# Altium PCB PCB2.PcbDoc
Units mm, origin at the board's own origin, x right, y up, seen from the top; angles counter-clockwise.
Board outline 49.4 x 66.43 mm, 2 copper layers (Top Layer, Bottom Layer); 50 components, 43 nets, 184 pads, 10 vias.
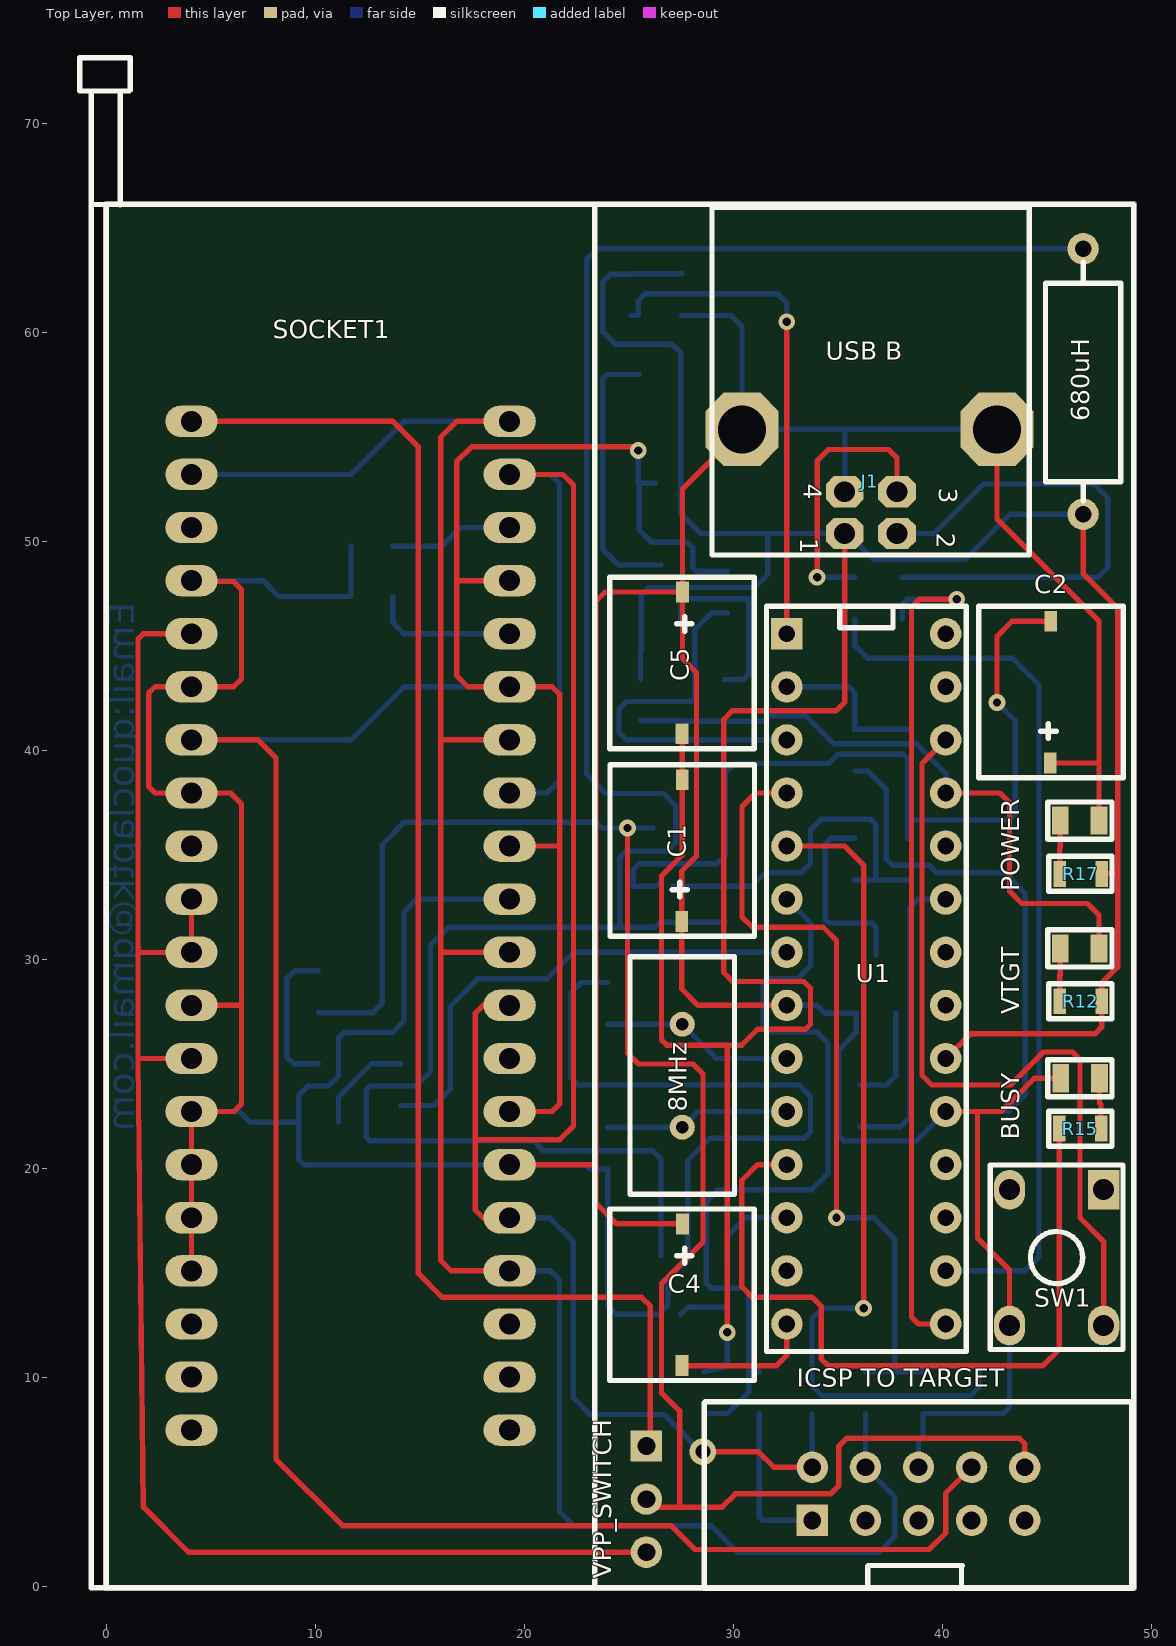
[diagram p0: Top Layer view]
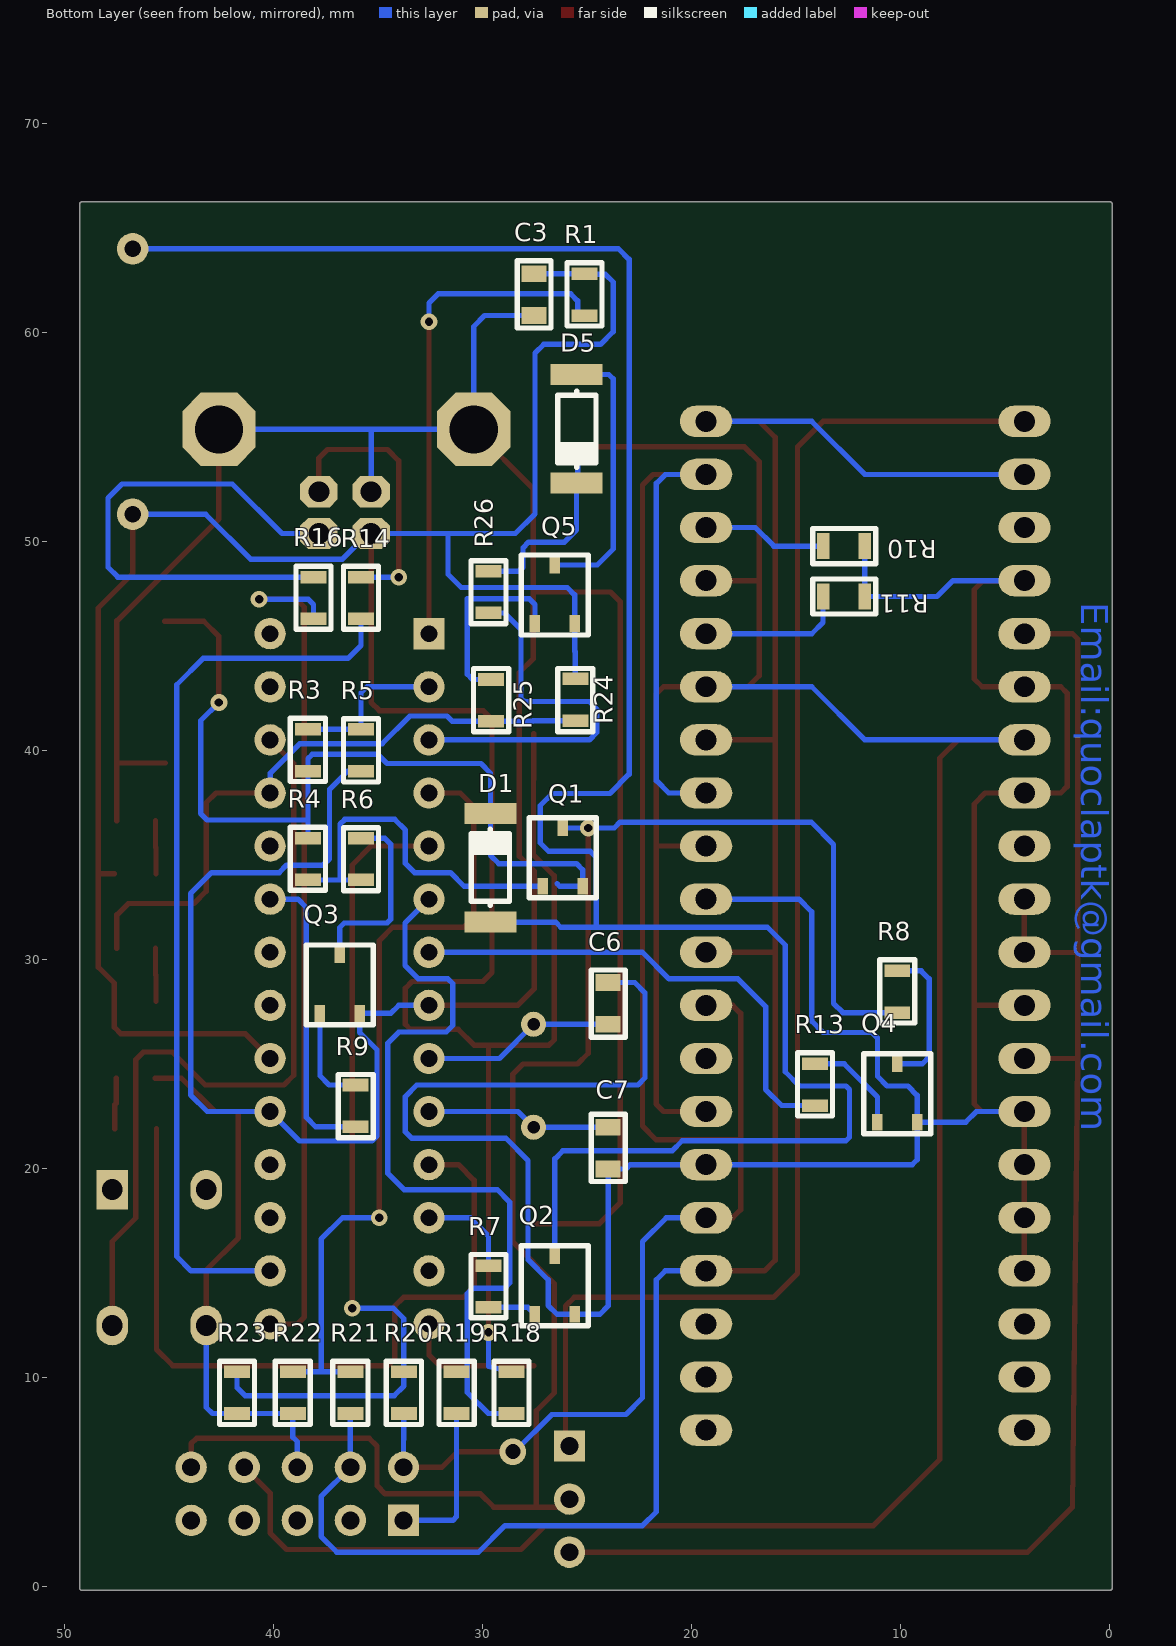
[diagram p1: Bottom Layer view, seen from below]

## Layer stack, top to bottom
Top Solder: solder mask 0.0102, Solder Resist, Dk 3.5
Top Layer: signal copper 0.0356
Dielectric 1: dielectric 0.32, FR-4, Dk 4.8
Bottom Layer: signal copper 0.0356
Bottom Solder: solder mask 0.0102, Solder Resist, Dk 3.5

## Board outline
-0.127,-0.047 -0.127,66.128 cw(c0,66.128) 0,66.255 49.149,66.255 cw(c49.149,66.128) 49.276,66.128 49.276,-0.047 cw(c49.149,-0.047) 49.149,-0.174 0,-0.174 cw(c0,-0.047)

## Design rules (kind name [scope] priority, off if disabled: settings)
Clearance [All] p1: gap=0.254 ignorepadtopadclearanceinfootprint=FALSE except(0: Arc-Hole Track-Hole SMDPad-Hole THPad-Hole Via-Hole Fill-Hole Poly-Hole Region-Hole Text-Hole)
PolygonConnect [All] p1: connectstyle=Relief reliefconductorwidth=0.254 reliefentries=4 polygonreliefangle="90 Angle" airgapwidth=0.254
RoutingVias [All] p1: holewidth=0.711 width=1.27 viastyle="Through Hole" minholewidth=0.711 minwidth=1.27 maxholewidth=0.711 maxwidth=1.27
SolderMaskExpansion [All] p1: expansion=0.102 istentingtop=FALSE
Width [All] p1: maxlimit=0.254 minlimit=0.254 preferedwidth=0.254
30 further rules are at their usual default settings.

## Components (designator, comment, footprint, x,y, rotation, side; value= is the part's Value field where it differs from the comment)
8MHz "8MHz" HC-49_THROUGH 27.559,24.458 r90 top (schematic designator Y1)
680uH "680uH" RES-0.5W-HH-MO 46.736,57.658 r90 top (schematic designator R2)
BUSY "LED0805" L0805RED 46.597,24.328 r270 top (schematic designator D3)
C1 "100uF" CAP_6.3_100uF 27.546,35.217 r90 top
C2 "10uF" CAP_6.3_100uF 45.185,42.799 r90 top
C3 "100nF" C0805 27.535,61.814 r90 bottom
C4 "22uF" CAP_6.3_100uF 27.559,13.97 r270 top
C5 "100uF" CAP_6.3_100uF 27.559,44.196 r270 top
C6 "22pF" C0805 23.99,27.908 r270 bottom
C7 "22pF" C0805 23.99,20.983 r90 bottom
D1 "1N4148" DO-213AB 29.591,34.417 r270 bottom
D5 "1N4148" DO-213AB 25.527,55.372 r90 bottom
"ICSP TO TARGET" "ICSP" IDC_CONNECTOR_10x2.54 38.862,4.445 r90 top (schematic designator J2)
J1 "USB B" USB-B-TYPE 35.33,50.384 r270 top
POWER "LED0805" L0805RED 46.569,36.652 r90 top (schematic designator D4)
Q1 "2N3906" SOT23-3 26.162,34.913 r180 bottom
Q2 "2N3904" SOT23-3 26.543,14.437 r180 bottom
Q3 "2N3904" SOT23-3 36.83,28.829 r180 bottom
Q4 "2N3904" SOT23-3 10.16,23.619 r180 bottom
Q5 "2N3906" SOT23-3 26.543,47.483 r180 bottom
R1 "2K2" R0805 23.597,61.763 r270 bottom
R3 "4K7" R0805 36.83,39.971 r270 bottom
R4 "100k" R0805 36.83,34.764 r270 bottom
R5 "2K7" R0805 37.338,40.071 r90 bottom
R6 "10k" R0805 37.338,34.864 r90 bottom
R7 "10k" R0805 28.194,14.317 r270 bottom
R8 "10k" R0805 8.636,28.414 r270 bottom
R9 "10k" R0805 37.592,23.053 r90 bottom
R10 "1K" R0805 12.761,48.26 r0 bottom
R11 "1K" R0805 12.761,45.847 r0 bottom
R12 "470" R0805 46.672,29.535 r0 top
R13 "10k" R0805 12.573,23.969 r270 bottom
R14 "10k" R0805 34.29,47.248 r270 bottom
R15 "470" R0805 46.545,20.391 r180 top
R16 "10k" R0805 36.566,47.248 r270 bottom
R17 "470" R0805 46.672,35.631 r0 top
R18 "4K7" R0805 30.136,9.337 r90 bottom
R19 "33" R0805 32.766,9.337 r90 bottom
R20 "33" R0805 35.287,9.337 r90 bottom
R21 "33" R0805 37.846,9.337 r90 bottom
R22 "4K7" R0805 40.601,9.337 r90 bottom
R23 "4K7" R0805 43.268,9.337 r90 bottom
R24 "10k" R0805 27.086,42.482 r90 bottom
R25 "10k" R0805 28.067,42.352 r270 bottom
R26 "10k" R0805 31.242,47.638 r90 bottom
SOCKET1 "ZIP-40" ZIP-40 11.742,32.791 r0 top
SW1 "Button1" BUTTON_HOLE_4.3mm 45.466,15.748 r0 top
U1 "PIC18F2550" DIP28_M04 36.364,29.083 r0 top
VPP_SWITCH "Header 3x1 TH Pitch 2.54mm" "Header 3x1 TH Pitch 2.54mm" 25.843,4.191 r270 top (schematic designator J3)
VTGT "LED0805" L0805RED 46.569,30.539 r90 top (schematic designator D2)

## Footprints (in the part's own frame and the unit in brackets; to place one, negate y for a bottom-side part, rotate by r counter-clockwise, add the part's x,y. Pads: shape width x height; smd on the part's side, far side on the other; paste and mask are expansions set on the pad)
BUTTON_HOLE_4.3mm [mm]
  rect 1.5x1.9 hole 1: 1(2.25,3.25)
  oval 1.5x1.9 hole 1: 2(2.25,-3.25) 3(-2.25,3.25) 4(-2.25,-3.25)
  silkscreen extent -3.17,-4.4 3.17,4.42, body extent -3,-3.86 3,3.86, height 4.3
C0805 [mm]
  rect 0.8x1.2 smd: 1(-1,0) 2(1,0)
  silkscreen extent -1.6,-0.81 1.63,0.81, body extent -1,-0.63 1,0.63, height 0.58
CAP_6.3_100uF [mm]
  rect 1x0.6 smd: 1(3.391,-0.013) 2(-3.391,0.013)
  silkscreen extent -4.1,-3.47 4.1,3.44, body extent -3.64,-3.31 3.66,3.29, height 5.9
DIP28_M04 [mm]
  rect 1.5x1.5 hole 0.8: 1(-3.8,16.51)
  round 1.5 hole 0.8: 2(-3.8,13.97) 3(-3.8,11.43) 4(-3.8,8.89) 5(-3.8,6.35) 6(-3.8,3.81) 7(-3.8,1.27) 8(-3.8,-1.27) 9(-3.8,-3.81) 10(-3.8,-6.35) 11(-3.8,-8.89) 12(-3.8,-11.43) 13(-3.8,-13.97) 14(-3.8,-16.51) 15(3.8,-16.51) 16(3.8,-13.97) 17(3.8,-11.43) 18(3.8,-8.89) 19(3.8,-6.35) 20(3.8,-3.81) 21(3.8,-1.27) 22(3.8,1.27) 23(3.8,3.81) 24(3.8,6.35) 25(3.8,8.89) 26(3.8,11.43) 27(3.8,13.97) 28(3.8,16.51)
  silkscreen extent -4.78,-17.83 4.78,17.83, body extent -3.9,-17.7 3.98,17.7, height 5.2
DO-213AB [mm]
  rect 1x2.5 smd: 1(2.625,-0.025) 2(-2.575,-0.025)
  silkscreen extent -1.82,-0.95 1.82,0.88, body extent -2.6,-1.3 2.6,1.3, height 2.64
HC-49_THROUGH [mm]
  round 1.2 hole 0.6: 1(-2.475,0) 2(2.45,0)
  silkscreen extent -5.68,-2.5 5.67,2.5, body extent -5.67,-2.5 5.68,2.5, height 3.68
"Header 3x1 TH Pitch 2.54mm" [mm]
  rect 1.5x1.5 hole 0.85: 1(-2.54,0)
  round 1.5 hole 0.85: 2(0,0) 3(2.54,0)
  body extent -3.81,-1.27 3.81,1.27, height 8.89
IDC_CONNECTOR_10x2.54 [mm]
  rect 1.5x1.5 hole 0.85: 1(-1.27,5.08)
  round 1.5 hole 0.85: 2(1.27,5.08) 3(-1.27,2.54) 4(1.27,2.54) 5(-1.27,0) 6(1.27,0) 7(-1.27,-2.54) 8(1.27,-2.54) 9(-1.27,-5.08) 10(1.27,-5.08)
  silkscreen extent -4.52,-10.2 4.4,10.25, body extent -4.5,-10.25 4.4,10.25, height 3.1
L0805RED [mm]
  rect 1.35x0.8 smd: 1(0,0.925) 2(0,-0.925)
  silkscreen extent -0.89,-1.55 0.89,1.52, body extent -0.67,-1.05 0.68,1.05, height 0.9
R0805 [mm]
  rect 0.6x1.24 smd: 1(-1.05,-1.524) 2(0.95,-1.524)
  silkscreen extent -1.57,-2.36 1.45,-0.69, body extent -1.05,-2.15 0.95,-0.9, height 0.45
RES-0.5W-HH-MO [mm]
  round 1.5 hole 0.8: 1(-6.35,0) 2(6.35,0)
  silkscreen extent -5.7,-1.8 5.7,1.8, body extent -6.62,-1.8 6.63,1.8, height 3.9
SOT23-3 [mm]
  rect 0.5x0.8 smd: 1(-0.95,-1.4) 2(0.95,-1.4) 3(0,1.4)
  silkscreen extent -1.6,-1.95 1.6,1.88, body extent -1.45,-1.4 1.45,1.4, height 1.3
USB-B-TYPE [mm]
  oct 1.5x1.8 hole 1: 1(0,0) 2(0,2.5) 3(-2,2.5) 4(-2,0)
  oct 3.5x3.5 hole 2.3: S1(-4.988,7.283) S2(-4.988,-4.909)
  silkscreen extent -15.6,-6.35 1.03,8.82, body extent -15.45,-6.18 0.85,8.68, height 10.98
ZIP-40 [mm]
  oval 2.5x1.5 hole 1: 1(-7.663,22.962) 2(-7.663,20.422) 3(-7.663,17.882) 4(-7.663,15.342) 5(-7.663,12.802) 6(-7.663,10.262) 7(-7.663,7.722) 8(-7.663,5.182) 9(-7.663,2.642) 10(-7.663,0.102) 11(-7.663,-2.438) 12(-7.663,-4.978) 13(-7.663,-7.518) 14(-7.663,-10.058) 15(-7.663,-12.598) 16(-7.663,-15.138) 17(-7.663,-17.678) 18(-7.663,-20.218) 19(-7.663,-22.758) 20(-7.663,-25.298) 21(7.562,-25.298) 22(7.562,-22.758) 23(7.562,-20.218) 24(7.562,-17.678) 25(7.562,-15.138) 26(7.562,-12.598) 27(7.562,-10.058) 28(7.562,-7.518) 29(7.562,-4.978) 30(7.562,-2.438) 31(7.562,0.102) 32(7.562,2.642) 33(7.562,5.182) 34(7.562,7.722) 35(7.562,10.262) 36(7.562,12.802) 37(7.562,15.342) 38(7.562,17.882) 39(7.562,20.422) 40(7.562,22.962)
  silkscreen extent -13.01,-32.84 11.64,40.36, body extent -13.03,-32.64 11.45,40.42, height 21.35

## Part data
8MHz: library part Crystal
680uH: library part "Resistors THD"
C1 C2 C4 C5: library part Capacitor(Radian)
C3 C6 C7: library part Capacitors(SMD)
D1 D5: library part "Diode 1N4148 SMD"
"ICSP TO TARGET": library part IDC_CONNECTOR_5x2
J1: library part "USB B Type"
R1 R3 R4 R5 R6 R7 R8 R9 R10 R11 R12 R13 R14 R15 R16 R17 R18 R19 R20 R21 R22 R23 R24 R25 R26: library part "Resistor SMD"

## Via types
v1: diameter 0.8, hole 0.4, Top Layer to Bottom Layer, 9 vias
v2: diameter 1.27, hole 0.711, Top Layer to Bottom Layer, 1 vias

## Nets (pads, with @x,y where several pads share a name; then routed paths per layer and width w, separated by ;. In a path a pad name is that pad's centre, name@x,y a point inside that pad or via, vN(x,y) a via of type N, cw(c..) or ccw(c..) an arc to the next point about the centre after c; other vN are vias at no path point)
AUX: R18.1 R19.2 U1.6 | length 38.3
  Bottom Layer w0.254: R18.1 29.725,8.287 30.734,9.296 R19.2@30.734,10.287 ; R19.2 R19.2@30.734,10.287 ; U1.6 33.706,31.751 33.706,29.718 33.071,29.083 31.656,29.083 31.42,28.847 31.42,26.861 31.738,26.543 34.002,26.543 34.532,26.013 34.532,19.775 33.755,18.998 29.298,18.998 28.702,18.402 28.702,14.529 28.956,14.275 30.48,14.275 30.734,14.021 R19.2@30.734,10.287
BT: SW1.2 U1.26 | length 38.3
  Top Layer w0.254: U1.26 39.033,39.382 39.033,24.467 39.497,24.003 43.268,24.003 44.843,25.578 46.228,25.578 46.584,25.222 46.584,17.653 47.716,16.521 SW1.2
BUSY: R15.2 U1.11 | length 36.7
  Top Layer w0.254: U1.11 31.157,20.193 30.404,19.44 30.404,14.357 30.918,13.843 33.782,13.843 34.203,13.423 34.203,10.909 34.532,10.579 44.822,10.579 45.595,11.353 R15.2
CLK: "ICSP TO TARGET.2" R20.1 SOCKET1.25 SOCKET1.29 SOCKET1.33 SOCKET1.39 | length 97.6
  Top Layer w0.254: SOCKET1.25 18.034,17.653 17.653,18.034 17.653,21.383 ; SOCKET1.29 18.034,27.813 17.653,27.432 17.653,21.383 ; SOCKET1.39 21.844,53.213 22.352,52.705 22.352,22.042 21.693,21.383 17.653,21.383 ; v2(28.55,6.465) 31.189,6.465 31.939,5.715 33.782,5.715
  Bottom Layer w0.254: SOCKET1.25 21.209,17.653 22.349,16.513 22.349,9.04 23.146,8.243 26.683,8.243 28.461,6.465 v2(28.55,6.465) ; SOCKET1.33 21.093,37.973 21.685,38.565 21.685,52.785 21.257,53.213 SOCKET1.39 ; R20.1 33.763,7.055 33.782,7.036 33.782,5.842
DAT: "ICSP TO TARGET.4" R21.1 SOCKET1.2 SOCKET1.24 SOCKET1.30 SOCKET1.34 SOCKET1.40 | length 106.5
  Top Layer w0.254: SOCKET1.24 16.51,15.113 16.002,15.621 16.002,30.339 ; SOCKET1.30 16.016,30.353 16.002,30.339 ; SOCKET1.34 16.012,40.513 16.002,40.503 ; SOCKET1.40 16.764,55.753 16.002,54.991 16.002,40.503 ; 16.002,30.339 16.002,40.503
  Bottom Layer w0.254: SOCKET1.2 11.709,53.213 14.249,55.753 SOCKET1.40 ; SOCKET1.24 21.258,15.113 21.685,14.686 21.685,3.588 22.352,2.921 28.929,2.921 30.199,1.651 36.969,1.651 37.72,2.402 37.72,4.317 36.322,5.715 ; 36.322,5.842 R21.1
DATA+: R14.2 U1.16 | length 43
  Bottom Layer w0.254: R14.2 35.814,45.033 36.434,44.413 43.364,44.413 44.628,43.15 44.628,15.799 43.942,15.113 U1.16
DATA-: R16.2 U1.15 | length 41.5
  Top Layer w0.254: U1.15 38.862,12.573 38.525,12.91 38.525,46.859 38.909,47.244 v1(40.691,47.244)
  Bottom Layer w0.254: R16.2 38.09,46.99 38.344,47.244 v1(40.691,47.244)
GND: "ICSP TO TARGET.6" BUSY.2 C1.2 C2.2 C3.1 C4.2 C5.2 C6.1 C7.1 J1.4 J1.S1 J1.S2 POWER.2 Q2.2 Q3.2 Q4.2 R5.1 R10.1 R11.1 R22.1 R23.1 SOCKET1.4 SOCKET1.6 SOCKET1.8 SOCKET1.12 SOCKET1.14 SOCKET1.15 SOCKET1.16 SOCKET1.17 SOCKET1.26 SOCKET1.31 SW1.4 U1.8 U1.19 | length 334.2
  Top Layer w0.254: SOCKET1.17 SOCKET1.16 SOCKET1.15 SOCKET1.14 6.12,22.733 6.477,23.09 6.477,27.787 ; SOCKET1.12 6.451,27.813 6.477,27.787 ; SOCKET1.4 4.125,48.087 6.096,48.087 6.477,47.706 6.477,43.434 6.096,43.053 SOCKET1.6 2.337,43.053 2.032,42.748 2.032,38.278 2.337,37.973 SOCKET1.8 5.954,37.973 6.477,37.45 6.477,27.787 ; SOCKET1.26 23.321,20.193 23.419,20.095 ; C4.2 24.422,17.361 23.419,18.364 23.419,20.095 ; J1.S2 27.572,52.522 C5.2 ; U1.8 28.321,27.813 27.534,28.6 27.534,31.55 27.534,34.239 28.245,34.95 28.245,43.726 27.572,44.399 C5.2 ; U1.19 41.681,22.733 ; J1.S1 42.613,51.087 47.494,46.207 47.494,39.4 ; SW1.4 43.216,15.154 41.681,16.689 41.681,22.733 ; C2.2 47.486,39.408 47.494,39.4 ; BUSY.2 44.403,24.328 42.808,22.733 41.681,22.733 ; POWER.2 47.494,39.4 ; 23.419,20.095 23.419,20.193 23.419,47.13 23.876,47.587 C5.2
  Bottom Layer w0.254: SOCKET1.14 6.375,22.733 6.889,22.219 Q4.2 ; SOCKET1.4 7.493,48.133 8.255,47.371 R11.1 R10.1 ; SOCKET1.31 14.858,32.893 14.249,32.284 14.249,27.056 13.711,26.518 11.37,26.518 11.11,26.258 11.11,24.42 10.643,23.952 9.652,23.952 9.21,23.51 Q4.2 ; C6.1 22.719,28.908 22.225,28.414 22.225,24.35 22.572,24.003 33.147,24.003 33.695,23.455 33.695,21.757 33.401,21.463 28.891,21.463 27.823,20.395 27.823,15.647 26.862,14.686 26.862,13.462 26.437,13.037 Q2.2 24.39,13.037 23.99,13.437 C7.1 23.146,19.983 22.936,20.193 SOCKET1.26 9.442,20.193 9.21,20.425 Q4.2 ; C3.1 29.899,60.814 30.421,60.292 J1.S2 35.33,55.372 ; U1.8 34.011,27.813 34.395,27.429 Q3.2 35.88,26.518 35.052,25.69 35.052,21.56 35.29,21.322 38.753,21.322 U1.19 43.168,22.733 43.966,23.531 43.966,33.165 42.968,34.163 39.726,34.163 39.37,34.519 37.628,34.519 37.323,34.823 37.323,38.147 36.449,39.021 R5.1 ; J1.4 35.33,55.372 ; 38.862,5.842 38.862,6.934 39.077,7.149 R22.1 R23.1 42.919,8.287 43.216,8.584 SW1.4 ; J1.S1 35.33,55.372
ICSP_CLK: R20.2 R23.2 U1.5 | length 40.2
  Top Layer w0.254: U1.5 35.33,35.433 36.235,34.528 v1(36.235,13.324)
  Bottom Layer w0.254: v1(36.235,13.324) 34.267,13.324 33.763,12.819 R20.2 33.763,9.606 34.225,9.144 41.363,9.144 41.744,9.525 R23.2
ICSP_DAT: R21.2 R22.2 U1.4 | length 38.2
  Top Layer w0.254: U1.4 31.067,37.973 30.421,37.327 30.421,32.046 30.918,31.55 34.305,31.55 34.937,30.918 v1(34.937,17.653)
  Bottom Layer w0.254: v1(34.937,17.653) 36.703,17.653 37.72,16.636 37.72,10.287 ; R21.2 37.72,10.287 ; R22.2 37.72,10.287
MCRL: R13.2 U1.7 | length 23.8
  Bottom Layer w0.254: R13.2 15.686,23.019 16.459,23.792 16.459,27.762 17.78,29.083 21.079,29.083 22.349,30.353 U1.7
NetC2_1: C2.1 D1.2 Q1.2 R3.2 R4.1 | length 40.7
  Top Layer w0.254: v1(42.613,42.303) 42.613,45.465 43.338,46.19 C2.1
  Bottom Layer w0.254: 26.437,33.643 26.307,33.513 Q1.2 25.212,34.301 25.502,34.591 29.224,34.591 29.616,34.983 D1.2 29.616,38.919 30.079,39.382 34.564,39.382 35.009,39.827 38.141,39.827 38.354,39.614 R3.2 38.354,36.685 ; R4.1 38.354,36.685 ; v1(42.613,42.303) 43.488,41.428 43.488,36.992 43.181,36.685 38.354,36.685
NetC4_1: C4.1 U1.14 | length 6.7
  Top Layer w0.254: C4.1 32.064,10.579 32.564,11.079 U1.14
NetD1_1: 680uH.2 D1.1 Q2.3 | length 107
  Bottom Layer w0.254: Q2.3 26.543,20.472 26.162,20.853 20.93,20.853 20.447,21.336 12.612,21.336 12.446,21.502 12.446,23.787 12.612,23.952 14.834,23.952 15.519,24.638 15.519,30.699 16.37,31.55 24.562,31.55 ; D1.1 26.5,31.792 26.257,31.55 24.562,31.55 ; 680uH.2 23.495,64.008 22.987,63.5 22.987,38.872 23.91,37.95 26.654,37.95 27.243,37.361 27.243,35.59 26.832,35.179 24.846,35.179 24.562,34.894 24.562,31.55
NetD2_1: R12.1 VTGT.1 | length 2.5
  Top Layer w0.254: R12.1 45.622,29.261 45.644,29.283 VTGT.1
NetD3_1: BUSY.1 R15.1 | length 2.4
  Top Layer w0.254: BUSY.1 47.522,23.136 47.595,23.063 R15.1
NetD4_1: POWER.1 R17.1 | length 2.6
  Top Layer w0.254: R17.1 45.622,35.357 45.644,35.379 POWER.1
NetJ1_2: J1.2 R16.1 | length 24.7
  Bottom Layer w0.254: J1.2 39.599,50.384 41.974,52.759 47.247,52.759 47.922,52.083 47.922,48.773 47.447,48.298 R16.1
NetJ1_3: J1.3 R14.1 | length 13.2
  Top Layer w0.254: v1(34.011,48.298) 34.011,53.861 34.556,54.407 37.417,54.407 37.83,53.994 J1.3
  Bottom Layer w0.254: v1(34.011,48.298) R14.1
NetJ2_1: "ICSP TO TARGET.1" R19.1 | length 7.5
  Bottom Layer w0.254: R19.1 31.242,3.353 31.42,3.175 33.782,3.175
NetQ1_1: Q1.1 R4.2 R6.1 | length 17.3
  Bottom Layer w0.254: Q1.1 30.885,33.513 31.535,34.163 33.253,34.163 33.695,34.605 33.695,36.205 34.203,36.713 36.587,36.713 36.815,36.485 36.815,33.814 ; R6.1 36.815,33.814 ; R4.2 36.815,33.814
NetQ2_1: Q2.1 R7.2 | length 2.4
  Bottom Layer w0.254: Q2.1 27.823,13.367 R7.2
NetQ3_1: Q3.1 R9.2 | length 4.9
  Bottom Layer w0.254: R9.2 37.338,24.003 37.78,24.445 Q3.1
NetQ3_3: Q3.3 R6.2 | length 9
  Bottom Layer w0.254: R6.2 34.683,35.814 34.395,35.526 34.395,31.92 34.565,31.749 36.615,31.749 36.83,31.535 Q3.3
NetQ4_1: Q4.1 R13.1 | length 4.9
  Bottom Layer w0.254: Q4.1 11.11,23.429 12.7,25.019 R13.1
NetQ4_3: Q4.3 R8.1 | length 7.1
  Bottom Layer w0.254: Q4.3 8.96,25.019 8.636,25.343 8.636,29.083 9.017,29.464 R8.1
NetQ5_1: Q5.1 R25.1 | length 9.1
  Bottom Layer w0.254: Q5.1 27.493,46.99 27.772,47.269 30.734,47.269 30.734,43.656 30.48,43.402 R25.1
NetR1_2: R1.2 U1.1 | length 24.6
  Top Layer w0.254: v1(32.564,60.514) U1.1 U1.1@32.766,45.795
  Bottom Layer w0.254: R1.2 25.451,60.814 25.451,61.519 25.781,61.849 32.131,61.849 32.564,61.416 v1(32.564,60.514)
NetR10_2: R10.2 SOCKET1.38 | length 6
  Bottom Layer w0.254: R10.2 16.063,49.784 16.952,50.673 SOCKET1.38
NetR11_2: R11.2 SOCKET1.36 | length 7.1
  Bottom Layer w0.254: R11.2 13.711,46.132 14.249,45.593 SOCKET1.36
OSC1: 8MHz.2 C6.2 U1.9 | length 9.3
  Bottom Layer w0.254: C6.2 8MHz.2 29.194,25.273 U1.9
OSC2: 8MHz.1 C7.2 U1.10 | length 8.9
  Bottom Layer w0.254: C7.2 8MHz.1 28.309,22.733 U1.10
PWR_TGT: D5.1 Q5.3 | length 13.1
  Bottom Layer w0.254: D5.1 23.961,57.997 23.749,57.785 23.749,49.645 24.511,48.883 Q5.3
VCC: 680uH.1 C1.1 C3.2 C5.1 J1.1 Q5.2 R1.1 R12.2 R17.2 R18.2 R24.2 U1.20 | length 157.8
  Top Layer w0.254: C5.1 27.553,40.799 27.553,38.614 C1.1 27.559,35.001 26.568,34.011 26.568,26.162 26.822,25.908 29.718,25.908 ; v1(29.718,12.167) 29.718,25.908 ; J1.1 35.33,42.303 34.937,41.91 29.972,41.91 29.546,41.484 29.546,29.382 29.972,28.956 33.37,28.956 33.695,28.631 33.695,26.908 33.457,26.67 31.166,26.67 30.404,25.908 29.718,25.908 ; U1.20 41.341,26.45 47.302,26.45 47.622,26.77 R12.2 47.622,28.876 48.387,29.642 48.387,34.164 ; 680uH.1 46.736,48.472 48.387,46.821 48.387,34.164 ; R17.2 48.33,34.107 48.387,34.164
  Bottom Layer w0.254: R24.2 25.562,44.729 25.593,44.76 Q5.2 25.593,47.45 25.946,47.803 31.019,47.803 31.656,48.439 31.656,50.384 ; C3.2 R1.1 25.091,62.784 24.12,62.784 23.749,62.414 23.749,60.046 24.359,59.436 27.071,59.436 27.493,59.014 27.493,51.326 28.435,50.384 31.656,50.384 ; R18.2 29.718,10.541 v1(29.718,12.167) ; 680uH.1 43.245,51.308 41.086,49.149 36.715,49.149 35.48,50.384 J1.1 31.656,50.384
VDD_FD: R26.1 U1.3 | length 18.3
  Bottom Layer w0.254: R26.1 28.956,46.587 28.159,45.79 28.159,42.507 27.998,42.346 24.892,42.346 24.536,41.99 24.536,40.869 24.892,40.513 U1.3
VDD_TGT_P: R24.1 R25.2 U1.25 VTGT.2 | length 30.6
  Top Layer w0.254: U1.25 42.753,37.973 43.216,37.51 43.216,33.276 43.802,32.69 46.945,32.69 47.494,32.141 VTGT.2
  Bottom Layer w0.254: R24.1 27.584,41.432 27.615,41.402 R25.2 31.445,41.402 31.699,41.656 33.477,41.656 34.798,40.335 38.742,40.335 40.164,38.914 U1.25
Vddp: "ICSP TO TARGET.8" D5.2 R26.2 SOCKET1.7 SOCKET1.27 SOCKET1.32 SOCKET1.35 SOCKET1.37 | length 154
  Top Layer w0.254: SOCKET1.7 7.264,40.513 8.128,39.649 8.128,6.096 11.303,2.921 27.017,2.921 28.16,1.778 39.37,1.778 40.164,2.572 40.164,4.477 41.402,5.715 ; SOCKET1.27 21.336,22.733 21.693,23.09 21.693,35.425 ; SOCKET1.32 21.685,35.433 21.693,35.425 ; SOCKET1.37 16.792,48.133 16.764,48.161 ; v1(25.451,54.356) 25.273,54.534 17.476,54.534 16.764,53.822 16.764,48.161 ; 41.338,5.779 41.402,5.842 ; 16.764,48.161 16.764,43.585 17.296,43.053 SOCKET1.35 21.336,43.053 21.693,42.696 21.693,35.425
  Bottom Layer w0.254: SOCKET1.7 11.709,40.513 14.249,43.053 SOCKET1.35 ; v1(25.451,54.356) 25.451,52.797 D5.2 ; D5.2@26.264,52.797 D5.2 ; R26.2 28.248,48.587 28.067,48.768 28.067,49.701 27.793,49.975 26.083,49.975 25.502,50.556 D5.2
VPP: "ICSP TO TARGET.10" Q1.3 R8.2 VPP_SWITCH.2 | length 82.7
  Top Layer w0.254: v1(24.943,36.297) 24.943,25.521 25.46,25.003 28.069,25.003 28.55,24.523 28.55,16.485 26.568,14.503 26.568,9.276 27.432,8.413 27.432,3.81 ; VPP_SWITCH.2@26.035,3.81 27.432,3.81 ; 43.942,5.715 43.942,6.846 43.688,7.1 35.421,7.1 35.052,6.731 35.052,4.838 34.659,4.445 30.099,4.445 29.464,3.81 27.432,3.81
  Bottom Layer w0.254: R8.2 12.764,27.464 13.208,27.908 13.208,35.51 14.274,36.576 23.419,36.576 23.698,36.297 v1(24.943,36.297) 26.162,36.297 Q1.3
VPP1: SOCKET1.5 SOCKET1.10 SOCKET1.11 SOCKET1.13 VPP_SWITCH.3 | length 76.8
  Top Layer w0.254: SOCKET1.13 1.524,25.261 ; SOCKET1.10 SOCKET1.11 1.524,30.341 ; SOCKET1.5 1.778,45.593 1.524,45.339 1.524,30.341 ; VPP_SWITCH.3 3.937,1.651 1.778,3.81 1.524,25.261 ; 1.524,25.261 1.524,30.341
VPP2: SOCKET1.1 VPP_SWITCH.1 | length 69.7
  Top Layer w0.254: SOCKET1.1 13.716,55.753 14.935,54.534 14.935,14.986 16.078,13.843 25.615,13.843 26.035,13.423 VPP_SWITCH.1@26.035,6.35
VPP_FD: R3.1 R5.2 U1.2 | length 7.7
  Bottom Layer w0.254: U1.2 35.527,43.053 35.814,42.766 R5.2 R3.1
VPP_ON: R9.1 U1.23 | length 14.5
  Bottom Layer w0.254: R9.1 37.981,22.003 38.43,22.452 38.43,32.485 38.838,32.893 U1.23
VPP_PUMP: R7.1 U1.12 | length 4.6
  Bottom Layer w0.254: R7.1 29.718,16.784 30.587,17.653 U1.12
pads on no net: "ICSP TO TARGET.3" "ICSP TO TARGET.5" "ICSP TO TARGET.7" "ICSP TO TARGET.9" SOCKET1.3 SOCKET1.9 SOCKET1.18 SOCKET1.19 SOCKET1.20 SOCKET1.21 SOCKET1.22 SOCKET1.23 SOCKET1.28 SW1.1 SW1.3 U1.13 U1.17 U1.18 U1.21 U1.22 U1.24 U1.27 U1.28

## Other copper
Bottom Layer:
  text "Email:quoclaptk@gmail.com" at 1.778,47.096 h2.2 r90

## Silkscreen, mask and mechanical layers (free items; w line width, h text height)
Top Overlay:
  lines w0.254: 0,-0.047 0,66.128 49.149,66.128 49.149,-0.047 0,-0.047

## Text inside footprints (layer, text, board x,y; h text height)
J1: Top Overlay "4" at 33.088,52.756 h1.5 r270; Top Overlay "2" at 39.438,50.419 h1.5 r270; Top Overlay "3" at 39.565,52.578 h1.5 r270; Top Overlay "1" at 32.91,50.19 h1.5 r270